# Altium PCB PM_PowerBoard_PCB.PcbDoc
Units mm, origin at the board's own origin, x right, y up, seen from the top; angles counter-clockwise.
Board outline 130 x 100 mm, 2 copper layers (Top Layer, Bottom Layer); 60 components, 39 nets, 161 pads, 10 vias.
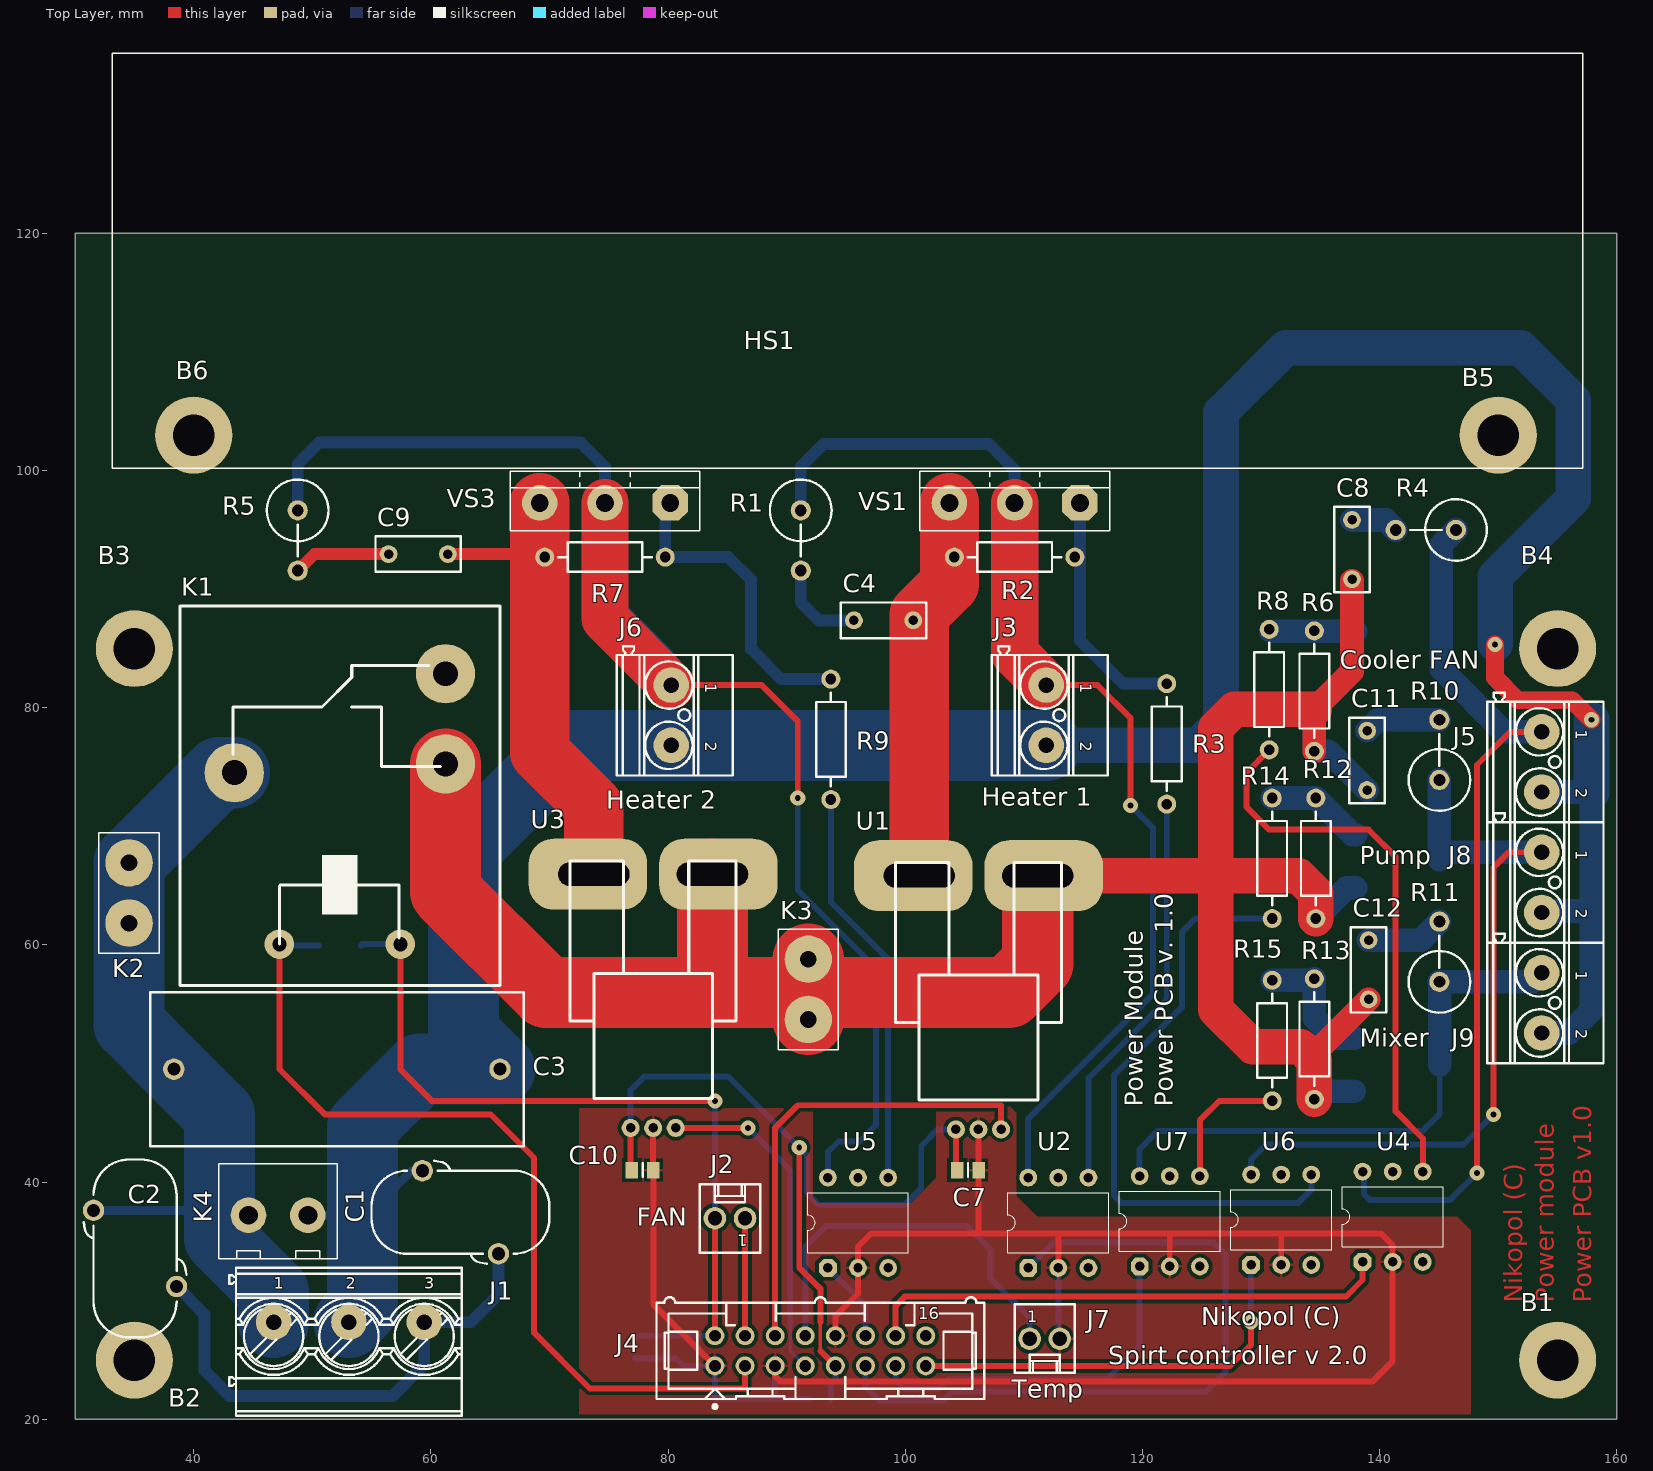
[diagram p0: Top Layer view]
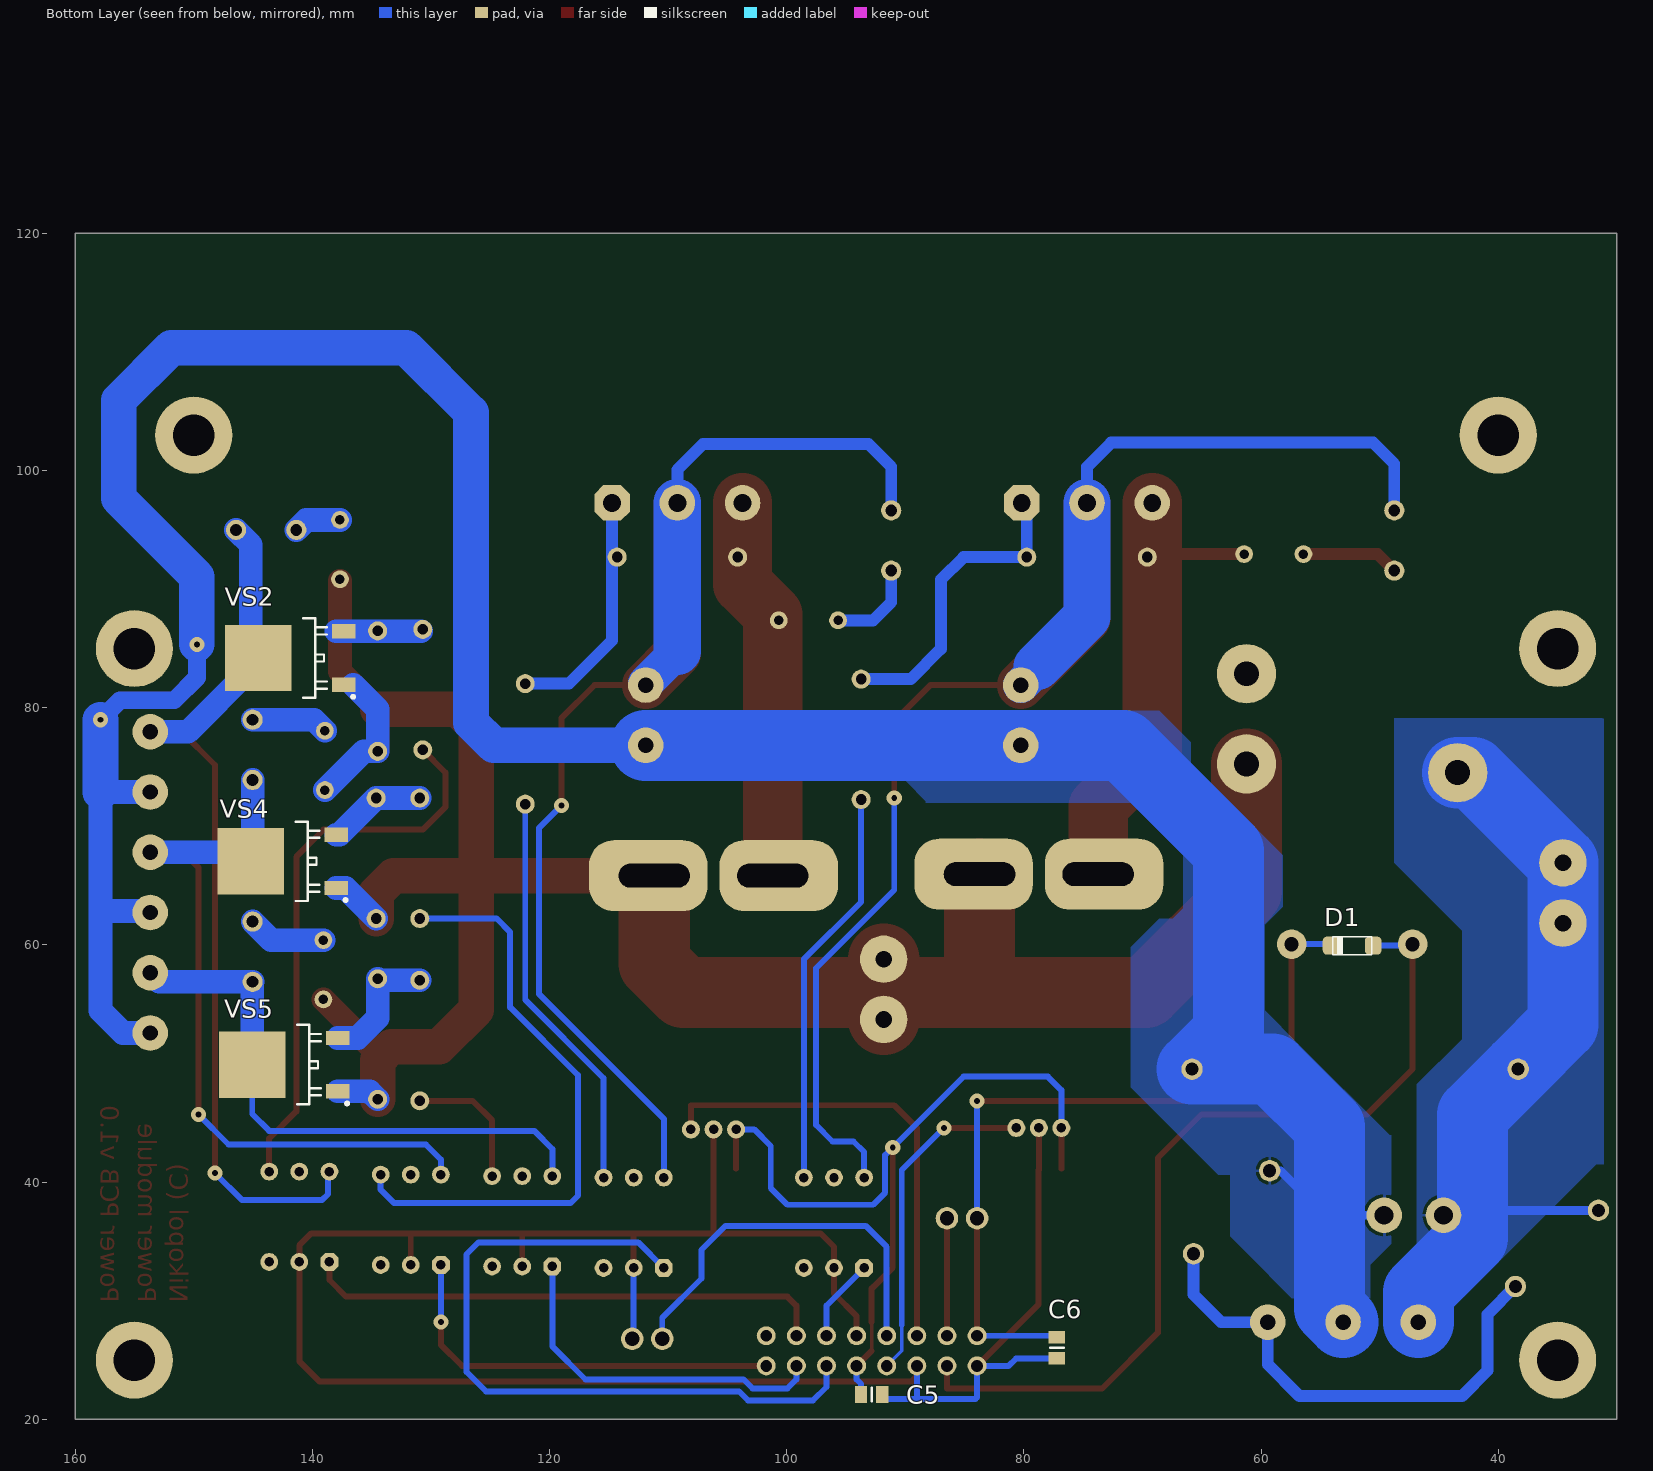
[diagram p1: Bottom Layer view, seen from below]
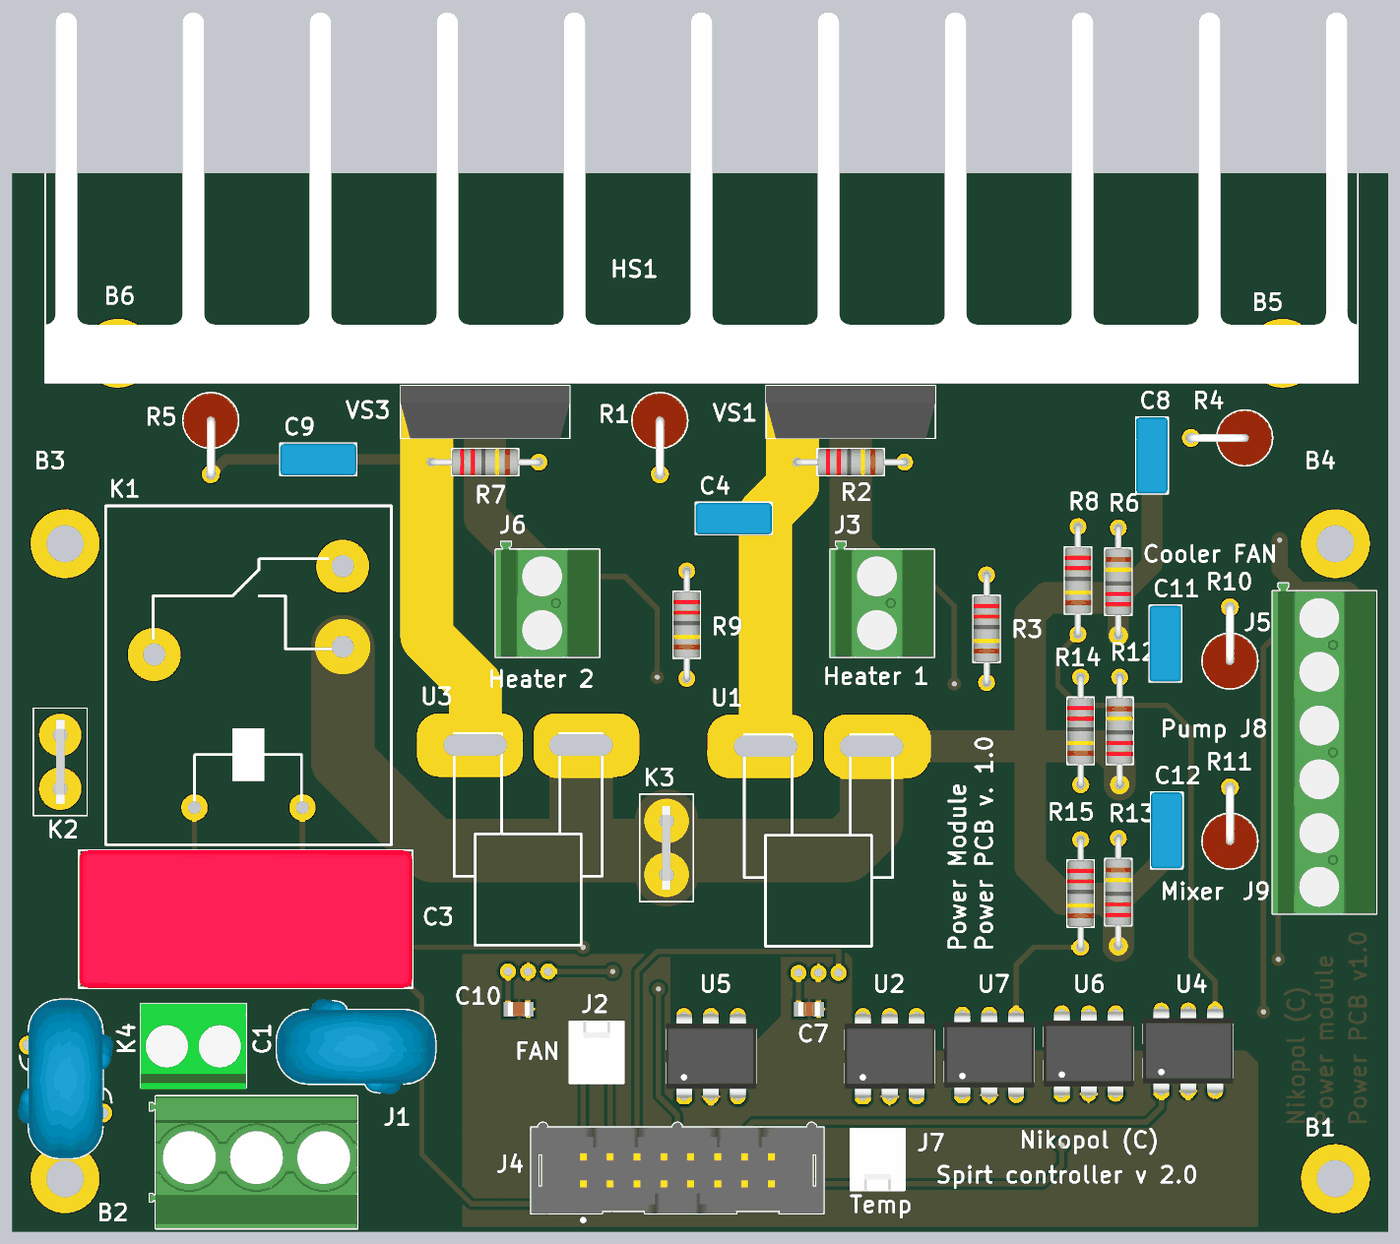
[diagram p2: 3D render of the assembled board from above, using the file's embedded part models]
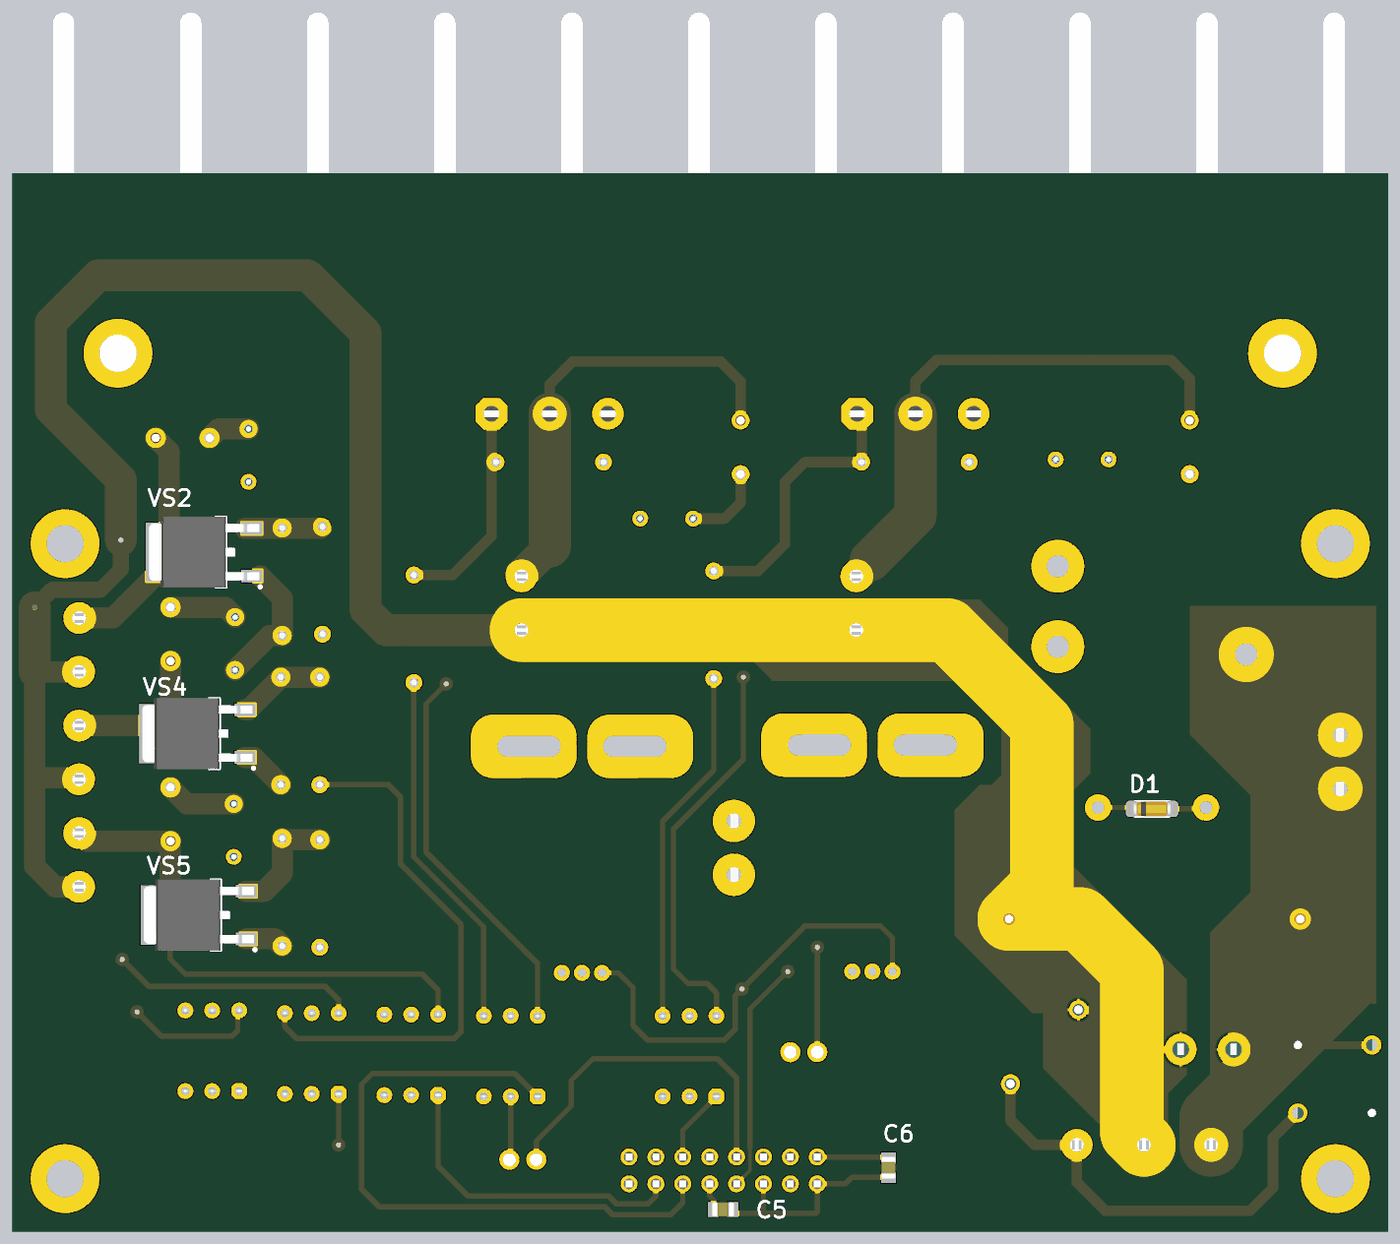
[diagram p3: 3D render of the assembled board from below, using the file's embedded part models]

## Layer stack, top to bottom
Top Solder: solder mask 0.0102, Solder Resist, Dk 3.5
Top Layer: signal copper 0.0356
Dielectric 1: dielectric 0.32, FR-4, Dk 4.8
Bottom Layer: signal copper 0.0356
Bottom Solder: solder mask 0.0102, Solder Resist, Dk 3.5

## Board outline
30,20 160,20 160,120 30,120

## Design rules (kind name [scope] priority, off if disabled: settings)
Clearance Clearance_1 [InNamedPolygon('Top Layer-GND')] p1: gap=0.3
Clearance [All] p2: gap=0.254
ComponentClearance ComponentClearance_1 [(ObjectKind = 'Component') And (Name = 'HS1')] p1: gap=0 collisioncheckmode=3 verticalgap=0 showdistances=FALSE
ComponentClearance [All   and not HasFootprint('PHOENIX_1715721') vs All and not HasFootprint('PHOENIX_1715721')] p2: gap=0.254 collisioncheckmode=3 verticalgap=0.254 showdistances=FALSE
ComponentClearance ConnectorsClearance [HasFootprint('PHOENIX_1715721') vs HasFootprint('PHOENIX_1715721')] p3: gap=0 collisioncheckmode=3 verticalgap=0 showdistances=FALSE
Height Height_1 [(ObjectKind = 'Component') And (Name = 'HS1')] p1: minheight=0 maxheight=75 prefheight=12.7
Height [All] p2: minheight=0 maxheight=50 prefheight=12.7
HoleSize [All] p1: absolutevalues=TRUE maxlimit=10 minlimit=0.3 maxpercent=80.000 minpercent=20.000
MinimumSolderMaskSliver [All] p1: minsoldermaskwidth=0
PolygonConnect [All] p1: connectstyle=Relief reliefconductorwidth=0.254 reliefentries=4 polygonreliefangle="90 Angle" airgapwidth=0.254
RoutingVias [All] p1: holewidth=0.711 width=1.27 viastyle="Through Hole" minholewidth=0.711 minwidth=1.27 maxholewidth=0.711 maxwidth=1.27
SilkToSilkClearance [All] p1: silktosilkclearance=0
SilkToSolderMaskClearance [IsPad] p1: minsilkscreentomaskgap=0 clearancetoexposedcopper=TRUE
SolderMaskExpansion [All] p1: expansion=0.102
UnpouredPolygon [All] p1: allowunpoured=FALSE
Width [All] p1: maxlimit=8 minlimit=0.254 preferedwidth=0.254
23 further rules are at their usual default settings.

## Components (designator, comment, footprint, x,y, rotation, side; value= is the part's Value field where it differs from the comment)
B1 "Plated Hole" MTG350_650#1 155,25 r0 top
B2 "Plated Hole" MTG350_650#1 35,25 r0 top
B3 "Plated Hole" MTG350_650#2 35,88 r0 top
B4 "Plated Hole" MTG350_650#2 155,88 r0 top
B5 "Plated Hole" MTG350_650#3 155,103 r0 top
B6 "Plated Hole" MTG350_650#4 35,103 r0 top
C1 "2.2nF" CAPRB_MURATA_DHRE4AD222Z4QB#1 62.484,37.465 r0 top
C2 "2.2nF" CAPRB_MURATA_DHRE4AD222Z4QB#2 35.052,34.417 r270 top
C3 "1uF" CAPR2750-1300X3150X2400 52.07,49.53 r180 top
C4 "10nF" CAPR500-300X720X650 98.171,87.376 r0 top
C5 "100nF" CAPC2012X135N 92.837,22.098 r0 bottom
C6 "100nF" CAPC2012X135N 77.216,26.035 r90 bottom
C7 "100nF" CAPC2012X135N 105.283,41.021 r180 top
C8 "10nF" CAPR500-300X720X650 137.668,93.345 r270 top
C9 "10nF" CAPR500-300X720X650 58.928,92.964 r0 top
C10 "100nF" CAPC2012X135N 77.851,41.021 r180 top
C11 "10nF" CAPR500-300X720X650 138.938,75.565 r270 top
C12 "10nF" CAPR500-300X720X650 139.065,57.912 r270 top
D1 "LL4148" SOD80/MLL34 52.324,59.944 r0 bottom
HS1 "124x35x70" "HeadSink 124x35x70" 95.123,100.203 r0 top
J1 "Family" PHOENIX_1714968 53.086,28.194 r0 top
J2 "KK®" MOLEX_22-27-2021 85.217,36.957 r180 top
J3 "Family" PHOENIX_1715721 111.887,79.375 r270 top
J4 "Header 16" 3M_N2516-6002RB 92.837,25.781 r0 top
J5 "Family" PHOENIX_1715721 153.67,75.438 r270 top
J6 "Family" PHOENIX_1715721 80.264,79.375 r270 top
J7 "KK®" MOLEX_22-27-2021 111.76,26.797 r0 top
J8 "Family" PHOENIX_1715721 153.67,65.278 r270 top
J9 "Family" PHOENIX_1715721 153.67,55.118 r270 top
K1 "NRP16T-A12D" NRP16T 52.324,60.071 r0 top
K2 "1287" "Keystone 1287" 34.544,64.389 r90 top
K3 "1287" "Keystone 1287" 91.821,56.261 r270 top
K4 "TS-501 2P" "TS-501 2P-2.5" 47.117,37.211 r0 top
R1 "39" RESADV508-1670X520 91.186,96.647 r270 top
R2 "390" RES1016-630X250 109.22,92.71 r180 top
R3 "360" RES1016-630X250 122.047,76.962 r90 top
R4 "39" RESADV508-1670X520 146.431,94.996 r180 top
R5 "39" RESADV508-1670X520 48.768,96.647 r270 top
R6 "390" RES1016-630X250 134.493,81.407 r270 top
R7 "390" RES1016-630X250 74.676,92.71 r180 top
R8 "360" RES1016-630X250 130.683,81.534 r90 top
R9 "360" RES1016-630X250 93.726,77.343 r90 top
R10 "39" RESADV508-1670X520 145.034,73.914 r90 top
R11 "39" RESADV508-1670X520 145.034,56.896 r90 top
R12 "390" RES1016-630X250 134.62,67.31 r270 top
R13 "390" RES1016-630X250 134.493,52.07 r270 top
R14 "360" RES1016-630X250 130.937,67.31 r90 top
R15 "360" RES1016-630X250 130.937,51.943 r90 top
U1 "ACS758" "CB Package" 106.172,44.45 r0 top
U2 "MOC3042" DIL6-300b 112.903,36.576 r0 top
U3 "ACS758" "CB Package" 78.74,44.577 r0 top
U4 "MOC3042" DIL6-300b 141.097,37.084 r0 top
U5 "MOC3042" DIL6-300b 96.012,36.576 r0 top
U6 "MOC3042" DIL6-300b 131.699,36.83 r0 top
U7 "MOC3042" DIL6-300b 122.301,36.703 r0 top
VS1 "BTA26-600BRG" TOP3-h34mm 109.22,97.282 r0 top
VS2 "BTA204S-600V" "TO-252-3L (DPAK)" 141.859,84.201 r0 bottom
VS3 "BTA26-600BRG" TOP3-h34mm 74.676,97.282 r0 top
VS4 "BTA204S-600V" "TO-252-3L (DPAK)" 142.494,67.056 r0 bottom
VS5 "BTA204S-600V" "TO-252-3L (DPAK)" 142.367,49.911 r0 bottom

## Footprints (in the part's own frame and the unit in brackets; to place one, negate y for a bottom-side part, rotate by r counter-clockwise, add the part's x,y. Pads: shape width x height; smd on the part's side, far side on the other; paste and mask are expansions set on the pad)
3M_N2516-6002RB [mm] "16 Contacts - Straight .100\" x .100\" Low Profile Four-Wall Header"
  round 1.6 hole 1: 1(-8.89,-1.27) 2(-8.89,1.27) 3(-6.35,-1.27) 4(-6.35,1.27) 5(-3.81,-1.27) 6(-3.81,1.27) 7(-1.27,-1.27) 8(-1.27,1.27) 9(1.27,-1.27) 10(1.27,1.27) 11(3.81,-1.27) 12(3.81,1.27) 13(6.35,-1.27) 14(6.35,1.27) 15(8.89,-1.27) 16(8.89,1.27)
  silkscreen extent -13.82,-4.85 13.82,4.52, body extent -13.82,-4.17 13.82,4.52, height 9.65
CAPC2012X135N [mm] "Chip Capacitor, Body 2.0x1.25mm, IPC Medium Density"
  rect 1.05x1.4 smd: 1(-0.9,0) 2(0.9,0)
  silkscreen extent 0,-0.58 0,0.58, body extent -1.05,-0.67 1.05,0.68, height 1.25
CAPR500-300X720X650 [mm] "Capacitor Radial, Pin spacing 5.0mm - Body With 3.0mm X Body Length 7.2mm X Body Height 6.5mm"
  round 1.5 hole 0.8: 1(-2.5,0) 2(2.5,0)
  silkscreen extent -3.6,-1.5 3.6,1.5, body extent -3.6,-1.5 3.6,1.5, height 6.5
CAPR2750-1300X3150X2400 [mm] "Capacitor Radial, Pin spacing 27.5mm - Body With 13mm X Body Length 31.5mm X Body Height 24mm"
  round 1.8 hole 1.1: 1(-13.75,0) 2(13.75,0)
  silkscreen extent -15.75,-6.5 15.75,6.5, body extent -15.75,-6.5 15.75,6.5, height 24
CAPRB_MURATA_DHRE4AD222Z4QB#1 [mm] "Capacitor Radial Button, Pin spacing 9.5mm - Body Diameter  15mm X Body Width 7mm X Body Height 20mm"
  round 1.8 hole 1.1: 1(-3.211,3.5) 2(3.211,-3.5)
  silkscreen extent -7.5,-4.34 7.5,4.33, body extent -7.5,-4.5 7.5,4.5, height 19
CAPRB_MURATA_DHRE4AD222Z4QB#2 [mm] "Capacitor Radial Button, Pin spacing 9.5mm - Body Diameter  15mm X Body Width 7mm X Body Height 20mm"
  round 1.8 hole 1.1: 1(-3.211,-3.5) 2(3.211,3.5)
  silkscreen extent -7.5,-4.33 7.5,4.34, body extent -7.5,-4.5 7.5,4.5, height 19
"CB Package" [mm]
  round 1.524 hole 0.8: 1(-1.9,0) 2(0,0) 3(1.9,0)
  rrect70% 10x6 hole 2 slot 6 at 0 deg copper offset 0.5,0: 4(5,21.4)
  rrect70% 10x6 hole 2 slot 6 at 0 deg copper offset -0.5,0: 5(-5,21.4)
  silkscreen extent -7,2.5 7,22.5
DIL6-300b [mm]
  oct 1.5x1.5 hole 0.8: 1(-2.54,-3.81)
  round 1.5 hole 0.8: 2(0,-3.81) 3(2.54,-3.81) 4(2.54,3.81) 5(0,3.81) 6(-2.54,3.81)
  silkscreen extent -4.25,-2.54 4.25,2.54, body extent -4.25,-3.96 4.25,3.96, height 4.25
"HeadSink 124x35x70" [mm]
  silkscreen extent -62,0 62,35, body extent -62.02,0 62.02,35.02, height 70
"Keystone 1287" [mm]
  round 4 hole 1.4: 1(-2.54,0) 1(2.54,0)
  silkscreen extent -5.08,-2.54 5.08,2.54, body extent -3.96,-0.42 3.96,0.38, height 16.2
MOLEX_22-27-2021 [mm] "2.54mm (.100\") Pitch KK® Header, Single Row, Vertical, 2 Circuits"
  round 1.9 hole 1.2: 1(-1.27,0.002) 2(1.27,-0.002)
  silkscreen extent -2.54,-2.88 2.54,2.92, body extent -2.54,-2.88 2.54,2.92, height 11.7
MTG350_650#1 [mm] "Plated Through Hole: Hole Dia.=3.5mm Pad Dia.=6.5mm"
  round 6.5 hole 3.5: 1(0,0)
MTG350_650#2 [mm] "Plated Through Hole: Hole Dia.=3.5mm Pad Dia.=6.5mm"
  round 6.5 hole 3.5: 1(0,-3)
MTG350_650#3 [mm] "Plated Through Hole: Hole Dia.=3.5mm Pad Dia.=6.5mm"
  round 6.5 hole 3.5: 1(-5,0)
MTG350_650#4 [mm] "Plated Through Hole: Hole Dia.=3.5mm Pad Dia.=6.5mm"
  round 6.5 hole 3.5: 1(5,0)
NRP16T [mm] "NRP16T Relay series foot print"
  round 2.5 hole 1.2: 1(-5.1,0) 2(5.1,0)
  round 5 hole 2.1: 3(-8.9,14.46) 4(8.9,22.8) 5(8.9,15.2)
  silkscreen extent -13.5,-3.5 13.5,28.5
PHOENIX_1714968 [mm] "Terminal Block, 30A 300V, Pitch 6.35mm, 3 Positions, Screw Connection"
  round 3 hole 1.3: 1(-6.35,0) 2(0,0) 3(6.35,0)
  silkscreen extent -10.1,-7.9 9.53,4.6, body extent -10.09,-7.9 9.53,4.6, height 21.5
PHOENIX_1715721 [mm] "Terminal Block, 17.5A 400V, Pitch 5.08mm, 2 Positions, Screw Connection"
  round 3 hole 1.3: 1(-2.54,0) 2(2.54,0)
  silkscreen extent -5.82,-4.6 5.08,5.2, body extent -5.82,-4.6 5.08,5.2, height 14.2
RES1016-630X250 [mm] "Resistor, Axial, Pad spacing 10.16 mm - Body Lengh 6.3mm X Body Diameter 2.5mm"
  round 1.6 hole 0.9: 1(-5.08,0) 2(5.08,0)
  silkscreen extent -3.95,-1.25 3.95,1.25, body extent -5.38,-1.27 5.38,1.26, height 2.51
RESADV508-1670X520 [mm] "Resistor, Axial, Vertical Mount, Lead spacing 5.08 mm - Body Lengh 16.7mm X Body Diameter 5.2mm"
  round 1.7 hole 1: 1(0,0) 2(5.08,0)
  silkscreen extent -2.6,-2.6 3.88,2.6, body extent -2.6,-2.6 5.47,2.6, height 23.6
SOD80/MLL34 [mil]
  rrect50% 55x60 smd: 1(-70,0) 2(70,0)
  silkscreen extent -65,-30 65,30, body extent -69,-28 69,27, height 55
"TO-252-3L (DPAK)" [mm] "DPAK TO-252, 2.28mm pitch; 2 pin, 9.7mm L X 6.7mm W X 2.40mm H body"
  rect 2x1.2 smd: 1(-4.5,2.25) 3(-4.5,-2.25)
  rect 5.6x5.6 smd: 2(2.7,0)
  silkscreen extent -5.42,-3.35 -1.1,3.39, body extent -5.2,-3.35 5.2,3.35, height 2.4
TOP3-h34mm [mm]
  round 3 hole 1.5: 1(-5.5,0) 2(0,0)
  oct 3x3 hole 1.5: 3(5.5,0)
  silkscreen extent -8,-2.34 8,2.67, body extent -8,-2.34 8,2.66, height 32.2
"TS-501 2P-2.5" [mm]
  round 3 hole 1.6: 1(-2.5,0) 2(2.5,0)
  silkscreen extent -5,-3.65 5,4.35, body extent -5,-3.75 5,4.35, height 1.5

## Part data
B1 B2 B3 B4 B5 B6: library part PLATED_HOLE3.5_PAD6.5, "Single Terminal Socket"
C1 C2: library part CCR_2.2NF_7.5KV_+80%-20%_MURATA_DHRE4AD222Z4QB, "Non-polarised capacitor"
C3: library part CPPR_1UF_275VAC_20%_2750-1300X3150X2400, "Non-polarised capacitor"
C4 C8 C9 C11 C12: library part CPER_10NF_400V_10%_500-300X720X650, "Non-polarised capacitor"
C5 C6 C7 C10: library part CC0805_100NF_50V_10%_X7R, "Non-polarised capacitor"
D1: "75V 0.3A SOD80/MLL34"
HS1: library part "HeadSink 124x35x70", "INDEL A5724/7"
J1: library part PHOENIX_1714968, "Terminal Block, 3 Positions, Screw Connection"
J2 J7: library part MOLEX_22-27-2021, "Connector 2 Male"
J3 J5 J6 J8 J9: library part PHOENIX_1715721, "Terminal Block, 2 Positions, Screw Connection"
J4: library part 3M_N2516-6002RB, "Connector 16 Male"
K1: library part "Relay NRP16T-A12D"
K2 K3: library part "Keystone 1287"
K4: "10A/300V AC 5mm"
R1 R4 R5 R10 R11: library part RMF_39R_5%_3W_250PPM_508-1670X520_v, "Resistor - 5%"
R2 R6 R7 R12 R13: library part RMF_390R_1%_0.6W_50PPM_1016-630X250, "Resistor - 1%"
R3 R8 R9 R14 R15: library part RMF_360R_1%_0.6W_50PPM_1016-630X250, "Resistor - 1%"

## Via types
v1: diameter 1.27, hole 0.5, Top Layer to Bottom Layer, tented both sides, 10 vias

## Nets (pads, with @x,y where several pads share a name; then routed paths per layer and width w, separated by ;. In a path a pad name is that pad's centre, name@x,y a point inside that pad or via, vN(x,y) a via of type N, cw(c..) or ccw(c..) an arc to the next point about the centre after c; other vN are vias at no path point)
+5V: C5.2 C7.2 C10.2 J4.9 U1.1 U3.1 | length 71.5
  Top Layer w0.3: 92.837,25.781 92.837,28.194
  Top Layer w0.5: C10.2@76.84,41.132 U3.1 ; v1(91.059,42.926) 91.059,32.797 92.706,31.15 92.837,31.019 92.837,28.194 ; 92.837,25.781 J4.9 ; C7.2@104.272,41.132 U1.1
  Bottom Layer w0.5: U3.1 76.84,47.757 77.978,48.895 85.09,48.895 v1(91.059,42.926) 91.694,42.291 91.694,39.116 92.71,38.1 99.949,38.1 101.346,39.497 101.346,43.053 102.743,44.45 U1.1 ; C5.2@93.737,21.717 93.737,22.998 94.107,23.368 J4.9
+12V: C6.2 D1.2 J2.2 J4.2 K1.2 | length 68.1
  Top Layer w0.5: K1.2 57.424,49.51 60.071,46.863 v1(83.947,46.863) ; J4.2 J2.2
  Bottom Layer w0.5: D1.2 54.229,60.071 K1.2 ; C6.2 77.332,27.051 J4.2 ; J2.2 v1(83.947,46.863)
GND: C5.1 C6.1 C7.1 C10.1 J4.1 J4.5 J4.10 J7.2 U1.2 U2.2 U3.2 U4.2 U5.2 U6.2 U7.2 | length 183.7
  Top Layer w0.5: C10.1@78.74,41.032 U3.2 ; C10.1 78.751,29.707 J4.1 ; J4.5 89.027,23.622 89.442,23.207 139.412,23.207 141.097,24.892 U4.2 141.097,34.671 140.081,35.687 131.699,35.687 ; J4.10 94.107,28.702 96.012,30.607 U5.2 96.012,34.544 97.155,35.687 112.903,35.687 ; C7.1@106.172,41.032 U1.2 ; 106.183,35.698 C7.1 ; U2.2 112.903,35.687 ; U7.2 122.301,35.687 ; U6.2 131.699,35.687 ; 112.903,35.687 122.301,35.687 ; 122.301,35.687 131.699,35.687
  Bottom Layer w0.5: C6.1 80.656,25.135 81.28,24.511 J4.1 83.947,21.844 84.074,21.717 89.027,21.717 ; J4.5 89.027,21.717 ; C5.1@91.937,21.717 89.027,21.717 ; U2.2 112.903,26.922 J7.2
NetC1_1: C1.1 C3.1 J1.2 J3.2 J5.2 J6.2 J8.2 J9.2 K4.2 | length 275.5
  Top Layer w1.5: v1(149.733,85.344) 149.733,82.55 151.638,80.645 156.21,80.645 v1(157.861,78.994)
  Bottom Layer w0.75: K4.2 54.229,37.211 54.61,37.211 58.364,40.965 C1.1
  Bottom Layer w1.5: v1(149.733,85.344) 149.733,82.55 151.638,80.645 156.21,80.645 v1(157.861,78.994)
  Bottom Layer w2: J9.2 155.956,52.578 157.861,54.483 157.861,62.865 J8.2@153.797,62.865 ; J5.2 157.861,72.898 157.861,62.992
  Bottom Layer w3: J3.2 124.714,76.835 126.619,78.74 126.619,104.902 132.08,110.363 151.892,110.363 156.337,105.918 156.337,97.663 149.733,91.059 v1(149.733,85.344) ; 157.861,72.898 v1(157.861,78.994)
  Bottom Layer w6: J1.2 54.229,29.337 54.229,37.211 54.229,44.704 59.055,49.53 C3.1 62.738,52.612 62.738,67.945 71.628,76.835 J6.2 J3.2
NetC1_2: C1.2 C2.2 J1.3 | length 42.8
  Bottom Layer w1: C2.2 40.894,28.864 40.894,24.13 43.053,21.971 56.769,21.971 59.436,24.638 J1.3 63.373,28.194 65.695,30.516 C1.2
NetC2_1: C2.1 C3.2 J1.1 K1.3 K2.1 K4.1 | length 68.5
  Bottom Layer w0.75: C2.1 42.164,37.628 K4.1@44.2,37.628
  Bottom Layer w6: K1.3 42.146,74.531 34.544,66.929 34.544,61.849 34.544,53.306 C3.2 42.164,45.686 42.164,37.628 42.164,35.306 46.736,30.734 J1.1
NetC4_1: C4.1 R1.2 | length 7.8
  Bottom Layer w1: R1.2 91.186,88.9 92.71,87.376 C4.1
NetC4_2: C4.2 R2.2 U1.5 VS1.1 | length 32.5
  Top Layer w5: U1.5 101.172,87.877 103.72,90.425 VS1.1
NetC8_1: C8.1 R4.2 | length 4
  Bottom Layer w2: C8.1 140.502,95.845 R4.2
NetC8_2: C8.2 C11.2 C12.2 K1.5 K3.1 R6.2 R12.2 R13.2 U1.4 U3.4 VS2.1 VS4.1 VS5.1 | length 201.5
  Top Layer w2: R6.2 134.493,79.883 137.668,83.058 C8.2@137.668,90.718 ; 135.088,51.435 C12.2
  Top Layer w3: U1.4 126.175,65.85 ; R13.2 134.493,50.292 133.35,51.435 129.286,51.435 126.175,54.546 126.175,65.85 ; 134.493,79.883 127.762,79.883 126.175,78.296 126.175,65.85 ; R12.2 134.62,64.389 133.159,65.85 126.175,65.85
  Top Layer w6: K1.5 61.224,64.506 69.723,56.007 91.821,56.007 ; 83.74,56.181 U3.4 ; K3.1@91.821,53.721 91.821,56.007 ; K3.1@91.821,58.801 91.821,56.007 ; U1.4 111.172,58.467 108.712,56.007 91.821,56.007
  Bottom Layer w2: R13.2 135.164,47.661 VS5.1 ; R12.2 137.196,64.806 VS4.1 ; VS2.1@136.561,81.951 134.493,79.883 R6.2 135.676,76.327 C11.2
NetC9_1: C9.1 R5.2 | length 8.2
  Top Layer w1: R5.2 50.165,92.964 C9.1
NetC9_2: C9.2 R7.2 U3.5 VS3.1 | length 41.1
  Top Layer w1: C9.2 R7.2@68.922,92.964 ; R7.2@69.176,92.71 R7.2
  Top Layer w5: VS3.1 69.176,92.71 69.176,76.239 73.74,71.675 U3.5
NetC11_1: C11.1 R10.2 | length 6.5
  Bottom Layer w2: C11.1 139.867,78.994 R10.2
NetC12_1: C12.1 R11.2 | length 6.6
  Bottom Layer w2: C12.1 143.47,60.412 R11.2
NetD1_1: D1.1 J4.3 K1.1 | length 74.9
  Top Layer w0.5: K1.1 47.224,49.55 51.054,45.72 65.024,45.72 68.707,42.037 68.707,27.305 73.406,22.606 86.487,22.606 J4.3
  Bottom Layer w0.5: K1.1 47.351,59.944 D1.1
NetJ2_1: J2.1 J4.4 | length 9.9
  Top Layer w0.5: J4.4 J2.1
NetJ3_1: J3.1 R1.1 U2.6 VS1.2 | length 111.1
  Top Layer w0.5: J3.1 116.205,81.915 118.999,79.121 v1(118.999,71.755)
  Top Layer w4: VS1.2 109.22,84.582 J3.1
  Bottom Layer w0.5: U2.6 110.363,45.339 120.904,55.88 120.904,69.85 v1(118.999,71.755)
  Bottom Layer w1: R1.1 91.186,100.33 93.091,102.235 107.061,102.235 109.22,100.076 VS1.2
  Bottom Layer w3: 109.22,84.756 J3.1@111.887,82.089
  Bottom Layer w4: 109.22,84.756 VS1.2
NetJ4_6: J4.6 U1.3 | length 39.4
  Top Layer w0.5: J4.6 89.027,44.577 90.937,46.487 108.072,46.487 U1.3
NetJ4_7: J4.7 U3.3 | length 28.2
  Top Layer w0.5: U3.3 v1(86.741,44.577)
  Bottom Layer w0.3: 90.297,27.94 90.297,25.781 J4.7
  Bottom Layer w0.5: v1(86.741,44.577) 90.297,41.021 90.297,27.94
NetJ4_8: J4.8 J7.1 | length 33.6
  Bottom Layer w0.5: J4.8 91.567,34.544 93.345,36.322 105.156,36.322 107.188,34.29 107.188,31.877 110.492,28.573 110.492,26.799 J7.1
NetJ4_11: J4.11 U2.1 | length 61.5
  Bottom Layer w0.5: J4.11 96.647,22.733 97.79,21.59 103.251,21.59 104.013,22.352 125.349,22.352 127,24.003 127,33.909 125.984,34.925 112.522,34.925 U2.1
NetJ4_12: J4.12 U5.1 | length 7
  Bottom Layer w0.5: U5.1 96.647,29.591 J4.12
NetJ4_13: J4.13 U7.1 | length 30.2
  Bottom Layer w0.5: J4.13 99.187,23.368 99.949,22.606 102.87,22.606 103.632,23.368 116.967,23.368 119.761,26.162 U7.1
NetJ4_14: J4.14 U4.1 | length 44.3
  Top Layer w0.5: J4.14 99.187,29.591 99.949,30.353 137.16,30.353 138.557,31.75 U4.1
NetJ4_15: J4.15 U6.1 | length 34.9
  Top Layer w0.5: J4.15 127.381,24.511 129.159,26.289 v1(129.159,28.194)
  Bottom Layer w0.5: v1(129.159,28.194) U6.1
NetJ5_1: J5.1 R4.1 U4.6 VS2.2 | length 75.7
  Top Layer w0.5: v1(148.209,40.767) 148.209,75.184 151.003,77.978 J5.1
  Bottom Layer w0.5: U4.6 138.684,40.767 138.684,38.989 139.192,38.481 145.923,38.481 v1(148.209,40.767)
  Bottom Layer w2: VS2.2@145.194,83.279 150.495,77.978 J5.1 ; VS2.2@145.194,84.201 145.194,93.759 R4.1
NetJ6_1: J6.1 R5.1 U5.6 VS3.2 | length 125.5
  Top Layer w0.5: J6.1 87.884,81.915 90.932,78.867 v1(90.932,72.39)
  Top Layer w4: VS3.2 74.676,87.503 J6.1
  Bottom Layer w0.5: v1(90.932,72.39) 90.932,64.643 97.536,58.039 97.536,44.831 96.139,43.434 94.361,43.434 93.472,42.545 U5.6
  Bottom Layer w1: R5.1 48.768,100.584 50.546,102.362 72.644,102.362 74.676,100.33 VS3.2
  Bottom Layer w3: 78.867,83.312 J6.1
  Bottom Layer w4: VS3.2 74.676,87.677 78.867,83.486
NetJ8_1: J8.1 R10.1 U6.6 VS4.2 | length 63.1
  Top Layer w0.5: v1(149.606,45.72) 149.606,66.548 150.876,67.818 J8.1
  Bottom Layer w0.5: U6.6 129.159,41.91 130.429,43.18 147.066,43.18 v1(149.606,45.72)
  Bottom Layer w2: VS4.2@145.034,67.216 R10.1 ; VS4.2@145.956,67.818 J8.1
NetJ9_1: J9.1 R11.1 U7.6 VS5.2 | length 48.9
  Bottom Layer w0.5: U7.6 119.761,42.799 121.285,44.323 143.637,44.323 145.067,45.753 VS5.2
  Bottom Layer w2: VS5.2 145.067,56.863 R11.1 152.908,56.896 J9.1
NetR2_1: R2.1 R3.2 VS1.3 | length 20.4
  Bottom Layer w1: VS1.3 114.72,85.686 118.364,82.042 R3.2
NetR3_1: R3.1 U2.4 | length 34.2
  Bottom Layer w0.5: U2.4 115.443,48.768 122.047,55.372 R3.1
NetR6_1: R6.1 R8.2 VS2.3 | length 7.1
  Bottom Layer w2: R8.2@130.846,86.451 VS2.3@137.994,86.451
NetR7_1: R7.1 R9.2 VS3.3 | length 25.8
  Bottom Layer w1: VS3.3@79.756,96.862 R7.1 85.09,92.71 86.995,90.805 86.995,84.963 89.535,82.423 R9.2
NetR8_1: R8.1 U4.4 | length 47.4
  Top Layer w0.5: R8.1 128.778,74.549 128.778,71.628 130.683,69.723 139.065,69.723 141.351,67.437 141.351,45.974 143.637,43.688 U4.4
NetR9_1: R9.1 U5.4 | length 33.9
  Bottom Layer w0.5: R9.1 93.726,63.627 98.552,58.801 U5.4
NetR12_1: R12.1 R14.2 VS4.3 | length 8.3
  Bottom Layer w2: R14.2 R12.1 137.704,69.306 VS4.3
NetR13_1: R13.1 R15.2 VS5.3 | length 11
  Bottom Layer w2: R15.2 134.366,57.023 R13.1 134.493,53.848 136.18,52.161 VS5.3
NetR14_1: R14.1 U6.4 | length 51.3
  Bottom Layer w0.5: R14.1 124.46,62.23 123.317,61.087 123.317,54.737 117.602,49.022 117.602,38.862 118.237,38.227 133.096,38.227 134.239,39.37 U6.4
NetR15_1: R15.1 U7.4 | length 11.5
  Top Layer w0.5: U7.4 124.841,45.212 126.492,46.863 R15.1
pads on no net: B1.1 B2.1 B3.1 B4.1 B5.1 B6.1 J4.16 K1.4 U2.3 U2.5 U4.3 U4.5 U5.3 U5.5 U6.3 U6.5 U7.3 U7.5

## Polygon pours and split planes (outlines as drawn)
NetC2_1 on Bottom Layer "Bottom Layer-C2_1" (solid, remove dead copper, pour order 2): 31.115,79.248 31.242,79.121 48.768,79.121 48.768,66.929 43.18,61.341 43.053,61.214 43.053,57.15 43.053,52.07 46.863,48.26 46.863,35.052 46.863,34.29 42.926,30.353 31.75,41.529 31.115,41.529
NetC1_1 on Bottom Layer "Bottom Layer-C1_1" (solid, remove dead copper, pour order 6): 50.8,30.226 57.277,30.226 57.404,30.226 61.214,34.036 62.611,35.433 62.611,40.64 63.627,40.64 70.993,48.006 70.993,59.817 68.707,62.103 68.58,62.23 67.437,62.23 66.802,62.865 66.548,63.119 66.548,67.564 70.866,71.882 70.993,72.009 88.265,72.009 88.265,72.136 89.916,73.787 89.916,79.756 68.58,79.756 66.04,77.216 65.913,77.089 65.913,75.565 65.913,75.311 58.547,67.945 58.166,67.564 58.166,63.881 58.166,63.246 59.69,61.722 59.69,57.15 59.69,54.483 56.896,51.689 49.149,43.942 49.022,43.942 49.022,34.798 50.8,33.02
GND on Top Layer "Top Layer-GND" (solid, remove dead copper, pour order 11): 72.517,46.228 92.075,46.228 92.202,46.101 92.202,38.735 92.71,38.227 93.472,38.227 100.457,38.227 101.981,39.751 102.616,40.386 102.616,46.355 108.839,46.355 109.347,45.847 109.347,39.116 109.347,38.862 110.363,37.846 111.125,37.084 146.431,37.084 146.558,37.084 147.574,36.068 147.701,35.941 147.701,20.447 72.517,20.447

## Other copper
Top Layer:
  text "Nikopol (C)" at 152.019,29.845 h1.52 r90
  text "Power module" at 154.686,29.845 h1.52 r90
  text "Power PCB v1.0" at 157.861,29.845 h1.52 r90

## Silkscreen, mask and mechanical layers (free items; w line width, h text height)
Top Overlay:
  text "Cooler FAN" at 136.652,83.312 h1.52
  text "Heater 1" at 106.426,71.755 h1.52
  text "Heater 2" at 74.803,71.501 h1.52
  text "Pump" at 138.303,66.802 h1.52
  text "Mixer" at 138.303,51.435 h1.52
  text "Power Module" at 120.015,46.355 h1.52 r90
  text "Power PCB v. 1.0" at 122.555,46.355 h1.52 r90
  text "FAN" at 77.343,36.322 h1.52
  text "Nikopol (C)" at 124.968,27.94 h1.52
  text "Spirt controller v 2.0" at 117.094,24.638 h1.52
  text "Temp" at 108.966,21.844 h1.52
Board:
  the board outline again, w0.254

## Text inside footprints (layer, text, board x,y; h text height)
J1: Top Overlay "1" at 46.736,30.994 h1; Top Overlay "2" at 52.807,30.994 h1; Top Overlay "3" at 59.436,30.994 h1; Mechanical 14 "3" at 59.436,30.994 h1; Mechanical 14 "2" at 52.807,30.994 h1; Mechanical 14 "1" at 46.736,30.994 h1
J2: Top Overlay "1" at 86.707,35.56 h1 r180; Mechanical 14 "1" at 86.707,35.56 h1 r180
J3: Top Overlay "2" at 114.745,77.153 h1 r270; Top Overlay "1" at 114.745,82.074 h1 r270; Mechanical 14 "2" at 114.745,77.153 h1 r270; Mechanical 14 "1" at 114.745,82.074 h1 r270
J4: Top Overlay "16" at 101.092,28.448 h1.02; Mechanical 14 "16" at 101.092,28.448 h1.02
J5: Top Overlay "2" at 156.528,73.215 h1 r270; Top Overlay "1" at 156.528,78.137 h1 r270; Mechanical 14 "2" at 156.528,73.215 h1 r270; Mechanical 14 "1" at 156.528,78.137 h1 r270
J6: Top Overlay "2" at 83.121,77.153 h1 r270; Top Overlay "1" at 83.121,82.074 h1 r270; Mechanical 14 "2" at 83.121,77.153 h1 r270; Mechanical 14 "1" at 83.121,82.074 h1 r270
J7: Top Overlay "1" at 110.27,28.194 h1; Mechanical 14 "1" at 110.27,28.194 h1
J8: Top Overlay "2" at 156.528,63.055 h1 r270; Top Overlay "1" at 156.528,67.977 h1 r270; Mechanical 14 "2" at 156.528,63.055 h1 r270; Mechanical 14 "1" at 156.528,67.977 h1 r270
J9: Top Overlay "2" at 156.528,52.895 h1 r270; Top Overlay "1" at 156.528,57.817 h1 r270; Mechanical 14 "2" at 156.528,52.895 h1 r270; Mechanical 14 "1" at 156.528,57.817 h1 r270